# Altium PCB WemosESP8266_PCB.PcbDoc
Units mil, origin at the board's own origin, x right, y up, seen from the top; angles counter-clockwise.
Board outline 1985 x 1610 mil, 4 copper layers (Top Layer, GND, 3.3VDC, Bottom Layer), stack 53.912 mil thick; 17 components, 18 nets, 65 pads, 0 vias.
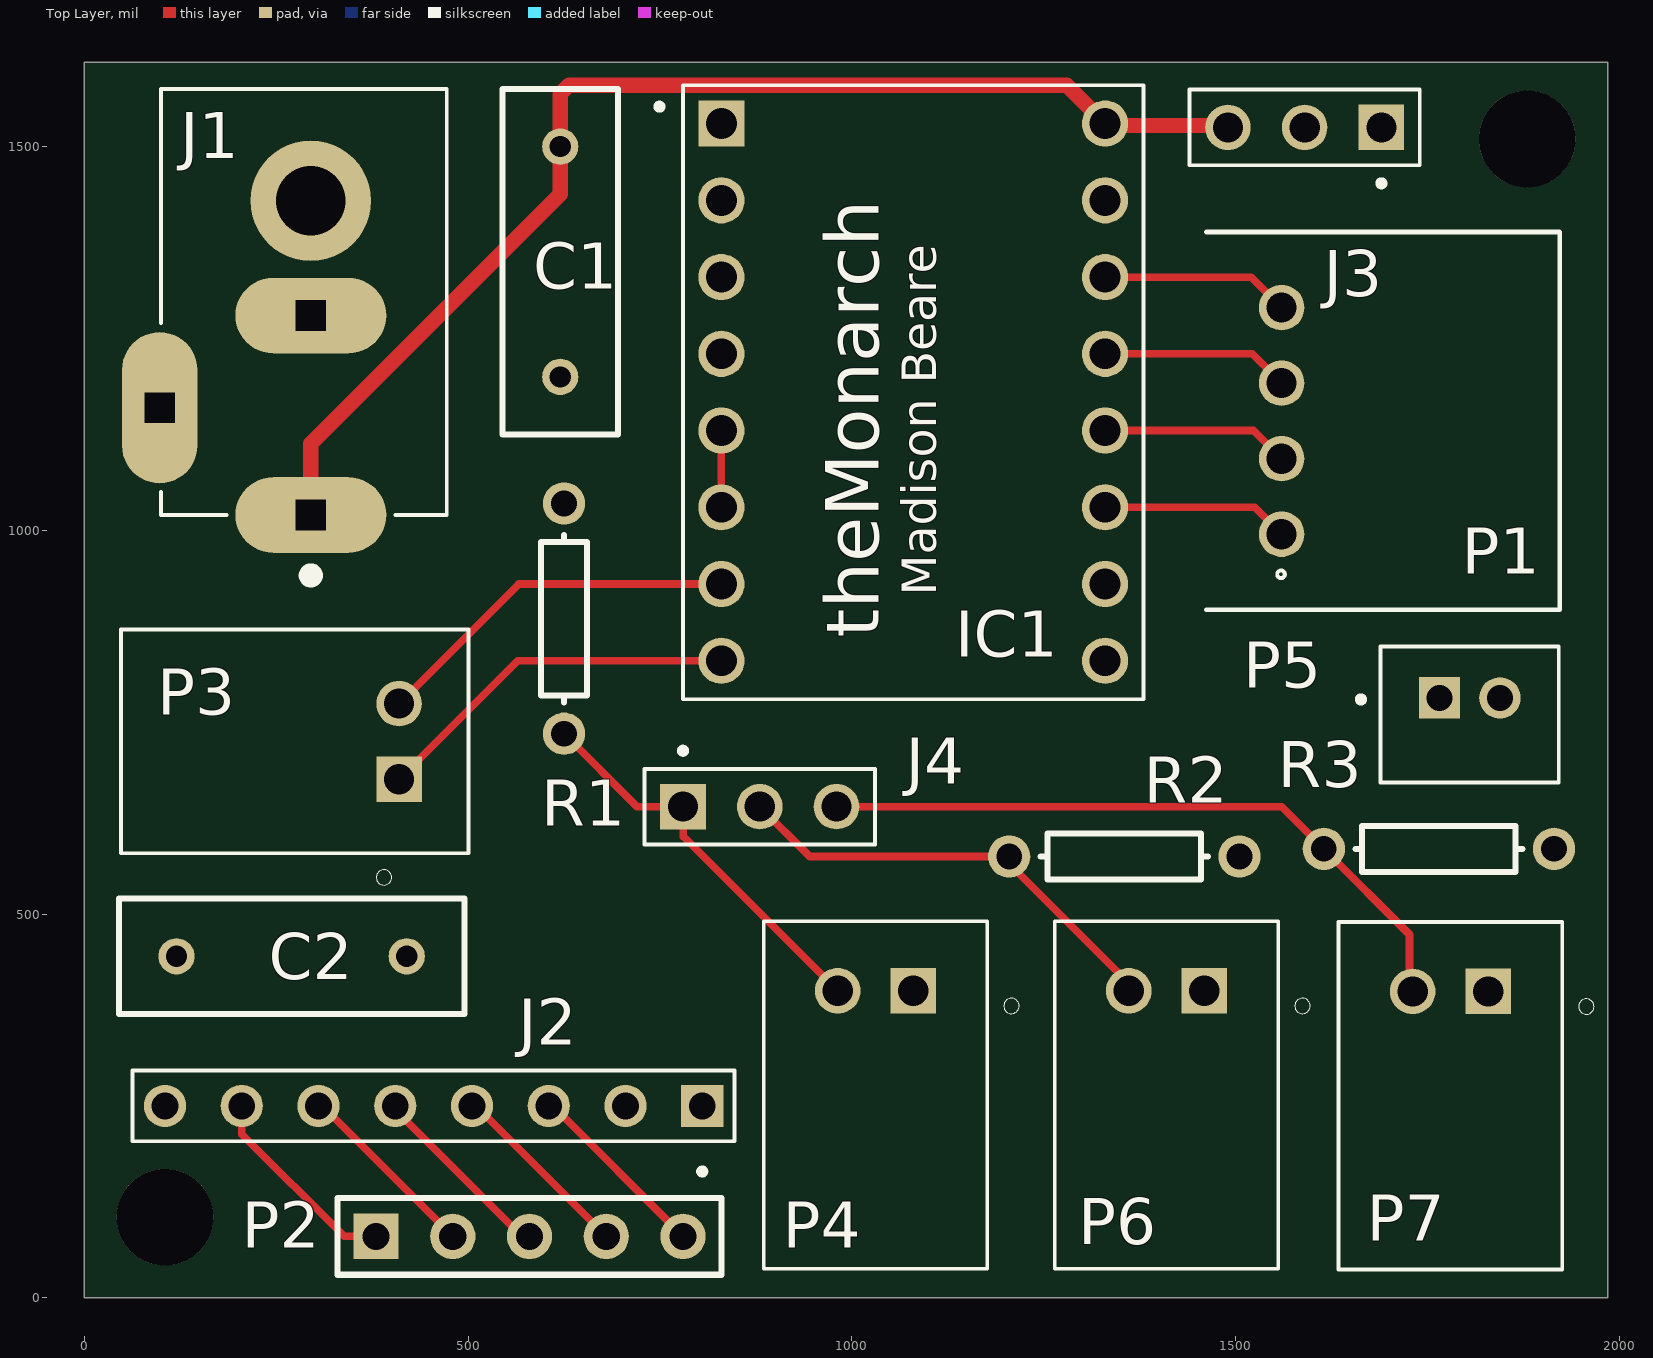
[diagram p0: Top Layer view]
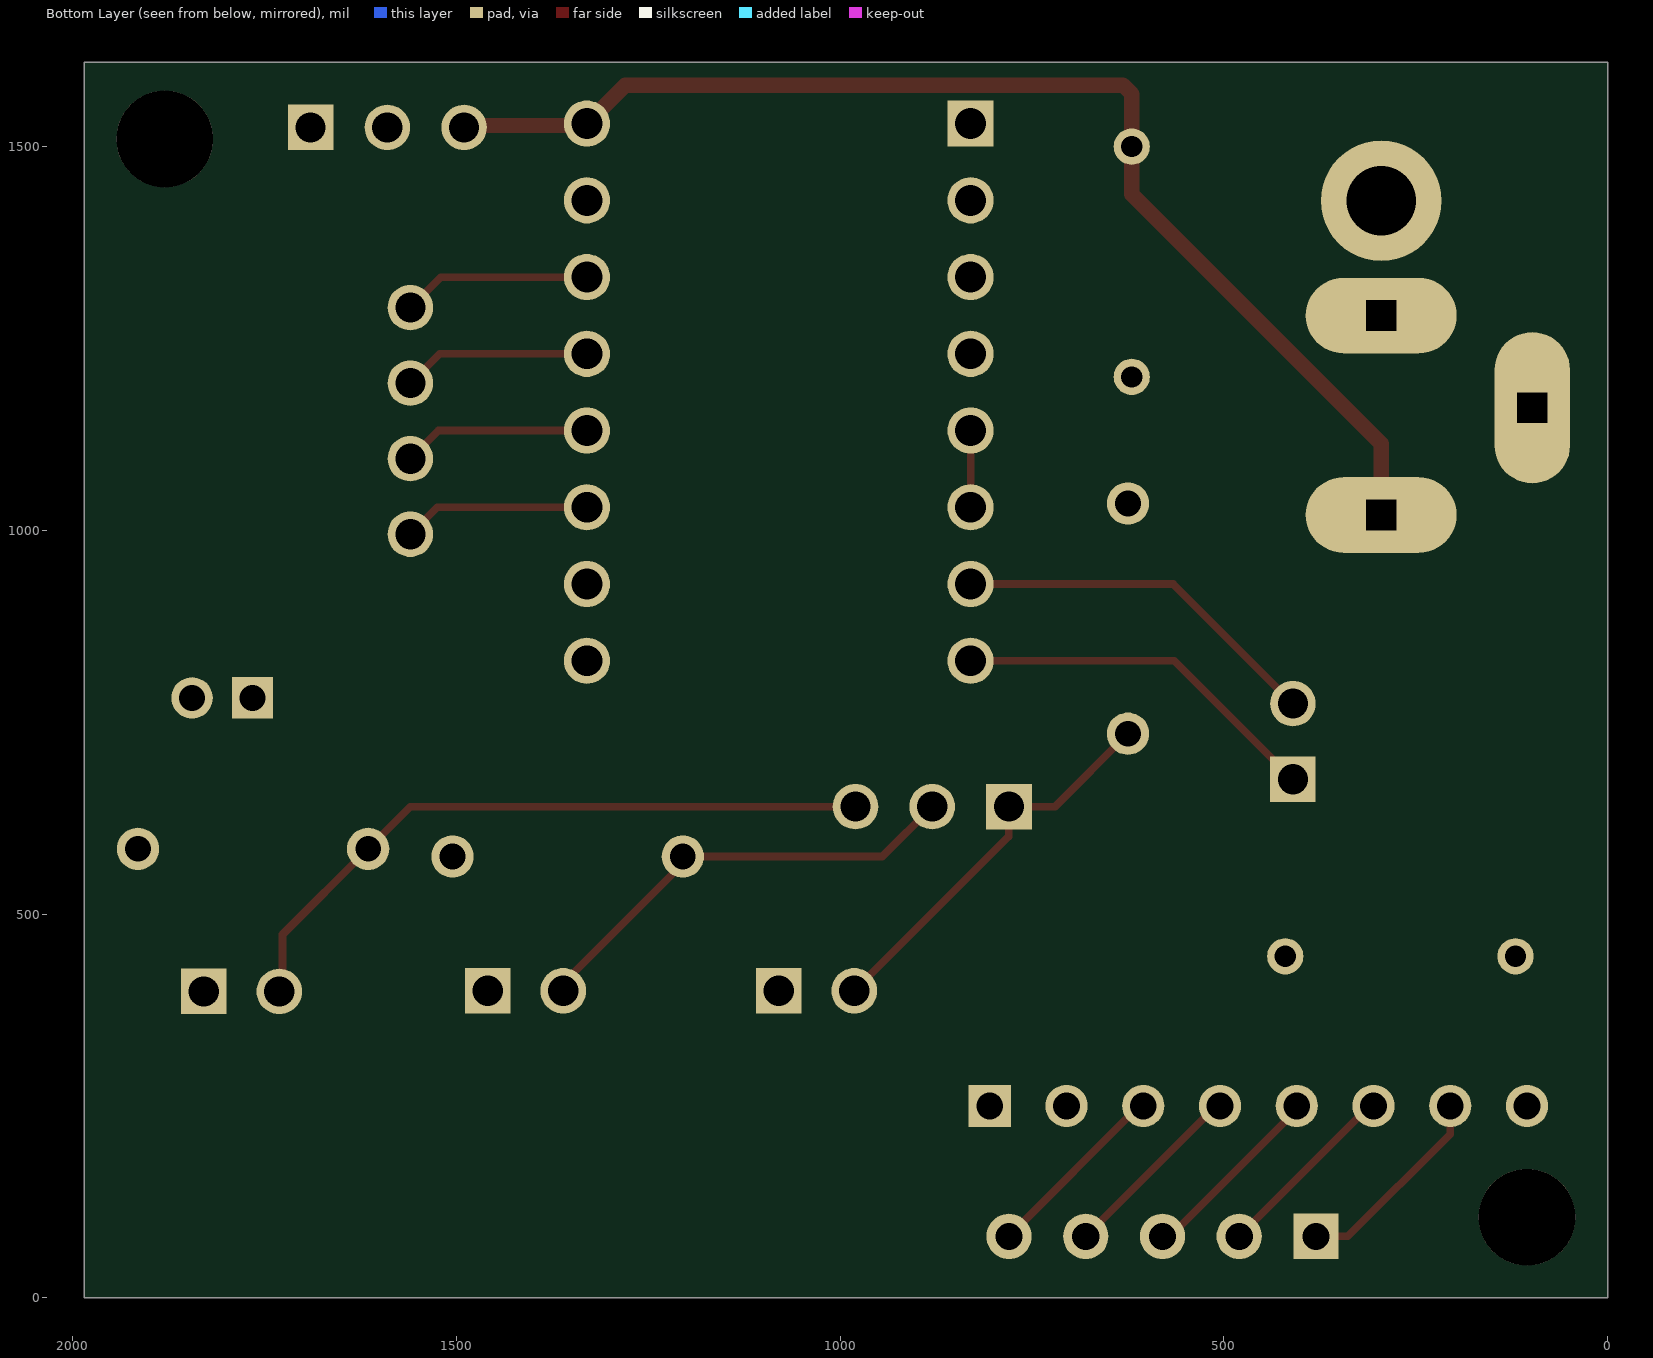
[diagram p1: Bottom Layer view, seen from below]
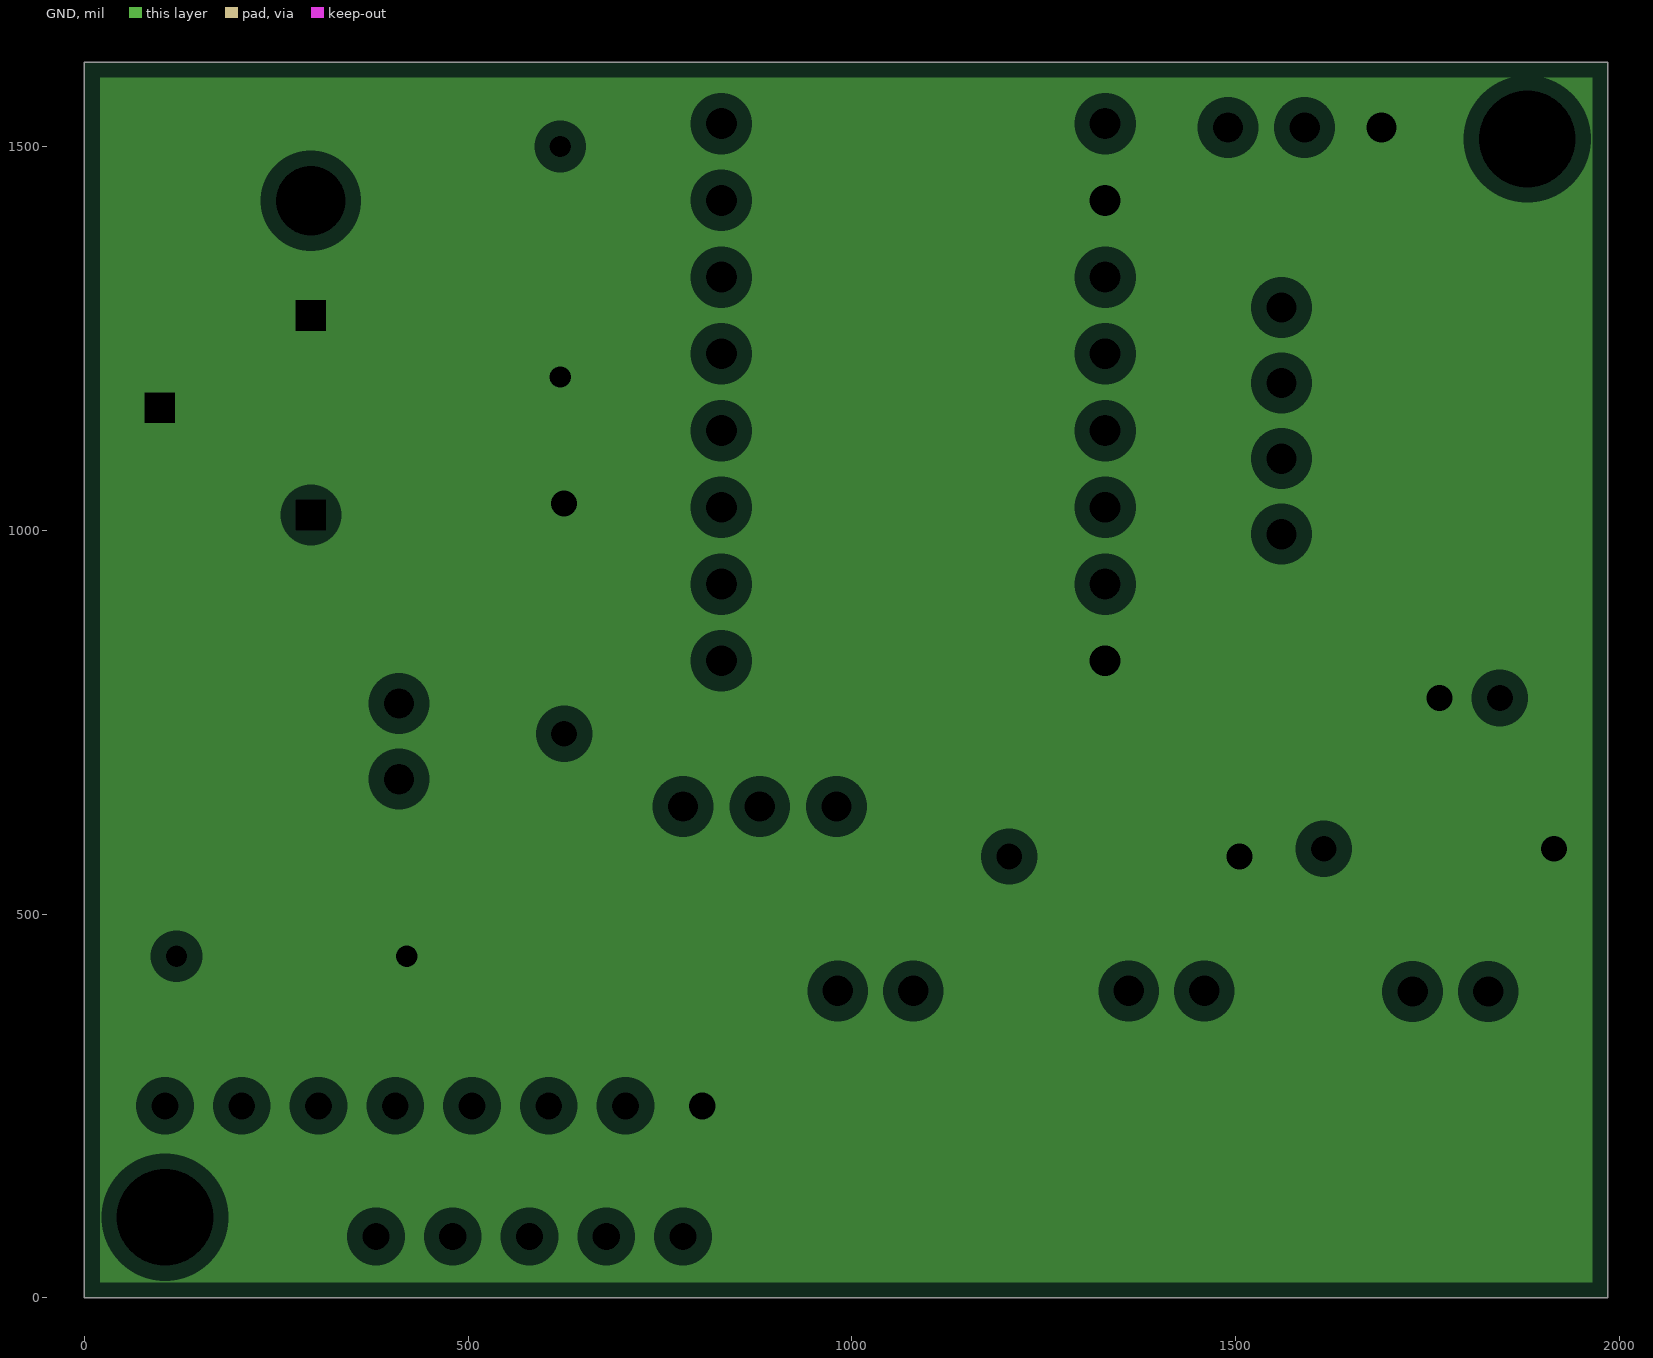
[diagram p2: GND, clearances drawn from the general rule]
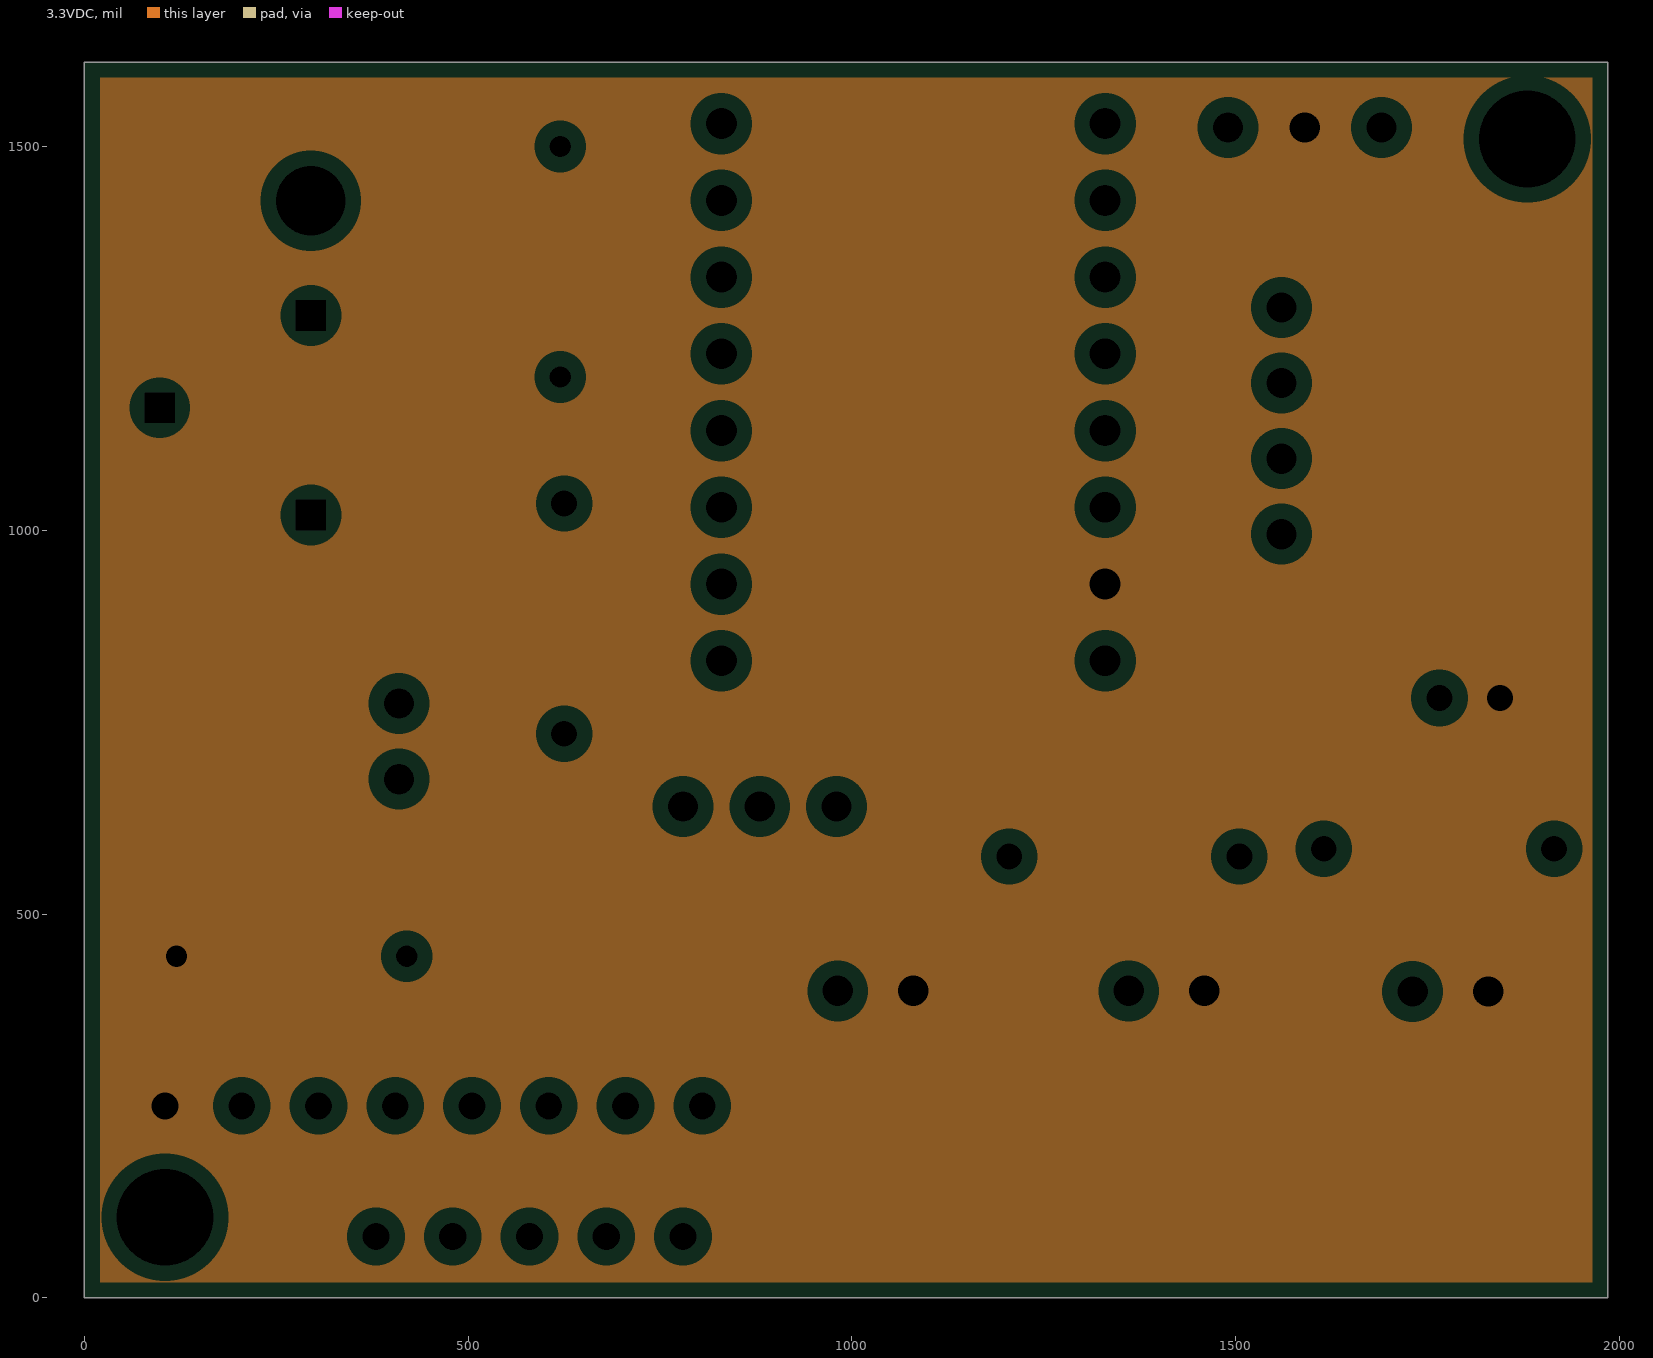
[diagram p3: 3.3VDC, clearances drawn from the general rule]

## Layer stack, top to bottom
Top Solder: solder mask 1, SM-001, Dk 4
Top Layer: signal copper 1.378
Dielectric 1: prepreg 5.1, PP-017, Dk 4.3
Dielectric 2: prepreg 5.1, PP-017, Dk 4.3
GND: plane copper 1.378, net GND
Dielectric 3: core 28, Core-039, Dk 4.8
3.3VDC: plane copper 1.378, net 3.3VDC
Dielectric 4: prepreg 5.1, PP-017, Dk 4.3
Dielectric 5: prepreg 5.1, PP-017, Dk 4.3
Bottom Layer: signal copper 1.378
Bottom Solder: solder mask 1, SM-001, Dk 4

## Board outline
0,0 0,1610 1985,1610 1985,0

## Design rules (kind name [scope] priority, off if disabled: settings)
Clearance [All] p1: gap=10 ignorepadtopadclearanceinfootprint=FALSE except(0: Arc-Hole Track-Hole SMDPad-Hole THPad-Hole Via-Hole Fill-Hole Poly-Hole Region-Hole Text-Hole)
HoleSize [All] p1: absolutevalues=TRUE maxlimit=130 minlimit=1 maxpercent=80.000 minpercent=20.000
PlaneClearance [All] p1: clearance=20
PlaneConnect [All] p1: planeconnectstyle=Relief reliefexpansion=20 reliefentries=4 reliefconductorwidth=10 reliefairgap=10
PolygonConnect [All] p1: connectstyle=Relief reliefconductorwidth=10 reliefentries=4 polygonreliefangle="90 Angle" airgapwidth=10
RoomDefinition WemosESP8266 [InComponentClass('WemosESP8266')] p1: confinementstyle=ConfineIn formatcopy=TRUE lockcomponents=FALSE outline 1980,1610 0,1610 0,5 1980,5
RoutingVias [All] p1: holewidth=28 width=50 viastyle="Through Hole" minholewidth=28 minwidth=50 maxholewidth=28 maxwidth=50
SilkToSolderMaskClearance [IsPad] p1: minsilkscreentomaskgap=7.5 clearancetoexposedcopper=TRUE
SolderMaskExpansion [All] p1: expansion=4 istentingtop=FALSE
Width [All] p1: maxlimit=20 minlimit=10 preferedwidth=10
26 further rules are at their usual default settings.

## Components (designator, comment, footprint, x,y, rotation, side; value= is the part's Value field where it differs from the comment)
C1 "100uF" RAD-0.3 620,1350 r270 top value=100pF
C2 "Cap" RAD-0.3 270,445 r180 top value=10uF
IC1 "a4988" MODULE_A4988_STEPPER_MOTOR_DRIVER_CARRIER 1080,1180 r0 top
J1 "FC681478" FC681478 295,1020 r90 top
J2 "nRF24L01+" TE_5-146278-8 455,250 r180 top
J3 "826936-3" TE_826936-3 1590,1525 r180 top
J4 "826936-3" TE_826936-3 880,640 r0 top
P1 "S4B-XH-A" S4B-XH-A(LF)(SN) 1559.21,1142.64 r180 top
P2 "Header 5" HDR1X5 380,80 r0 top
P3 "2x1 Header" JST_S2B-XH-A(LF)(SN) 410,725 r90 top
P4 "2x1 Header" JST_S2B-XH-A(LF)(SN) 1030.79,400 r180 top
P5 "B2B-PH-K-S" JST_B2B-PH-K-S(LF)(SN) 1805,760 r180 top
P6 "2x1 Header" JST_S2B-XH-A(LF)(SN) 1410,400 r180 top
P7 "2x1 Header" JST_S2B-XH-A(LF)(SN) 1779.96,399.17 r180 top
R1 "Res1" AXIAL-0.3 625,885 r90 top value=10K
R2 "Res1" AXIAL-0.3 1355,575 r0 top value=1K
R3 "Res1" AXIAL-0.3 1765,585 r0 top value=1K

## Footprints (in the part's own frame and the unit in brackets; to place one, negate y for a bottom-side part, rotate by r counter-clockwise, add the part's x,y. Pads: shape width x height; smd on the part's side, far side on the other; paste and mask are expansions set on the pad)
AXIAL-0.3 [mm] "Axial Device, Thru-Hole; 2 Leads; 0.3 in Pin Spacing"
  round 1.4 hole 0.85: 1(-3.81,0) 2(3.81,0)
  silkscreen extent -2.77,-0.76 2.77,0.76
FC681478 [mm]
  oval 2.5x5 hole 1 square: 1(0,0) 2(6.6,0)
  round 4 hole 2.3: 1(10.4,0)
  oval 5x2.5 hole 1 square: 3(3.55,5)
  silkscreen extent -2.2,-4.5 14.1,4.95
HDR1X5 [mm] "Connector; Header; 5 Position"
  rect 1.5x1.5 hole 0.9: 1(0,0)
  round 1.5 hole 0.9: 2(2.54,0) 3(5.08,0) 4(7.62,0) 5(10.16,0)
  silkscreen extent -1.27,-1.27 11.43,1.27
JST_B2B-PH-K-S(LF)(SN) [mm]
  rect 1.368x1.368 hole 0.86: 1(1,-0.55)
  round 1.368 hole 0.86: 2(-1,-0.55)
  silkscreen extent -2.95,-2.25 3.7,2.25
JST_S2B-XH-A(LF)(SN) [mm]
  rect 1.508x1.508 hole 1: 1(-1.25,0)
  round 1.508 hole 1: 2(1.25,0)
  silkscreen extent -4.75,-2.3 3.7,9.2
MODULE_A4988_STEPPER_MOTOR_DRIVER_CARRIER [mm]
  rect 1.53x1.53 hole 1.02: 1(-6.35,8.89)
  round 1.53 hole 1.02: 2(-6.35,6.35) 3(-6.35,3.81) 4(-6.35,1.27) 5(-6.35,-1.27) 6(-6.35,-3.81) 7(-6.35,-6.35) 8(-6.35,-8.89) 9(6.35,-8.89) 10(6.35,-6.35) 11(6.35,-3.81) 12(6.35,-1.27) 13(6.35,1.27) 14(6.35,3.81) 15(6.35,6.35) 16(6.35,8.89)
  silkscreen extent -8.5,-10.16 7.62,10.16
RAD-0.3 [mm] "Radial Cap, Thru-Hole; 2 Leads; 0.3 in Pin Spacing"
  round 1.2 hole 0.7: 1(-3.81,0) 2(3.81,0)
  silkscreen extent -5.71,-1.91 5.71,1.91
S4B-XH-A(LF)(SN) [mm]
  round 1.508 hole 1: 1(-0.02,3.75) 2(-0.02,1.25) 3(-0.02,-1.25) 4(-0.02,-3.75)
  silkscreen extent -9.22,-6.25 2.48,6.25
TE_5-146278-8 [mm]
  rect 1.398x1.398 hole 0.89: 1(-8.89,0)
  round 1.398 hole 0.89: 2(-6.35,0) 3(-3.81,0) 4(-1.27,0) 5(1.27,0) 6(3.81,0) 7(6.35,0) 8(8.89,0)
  silkscreen extent -9.96,-1.17 9.96,2.27
TE_826936-3 [mm]
  rect 1.508x1.508 hole 1: 1(-2.54,0)
  round 1.508 hole 1: 2(0,0) 3(2.54,0)
  silkscreen extent -3.81,-1.25 3.81,1.95

## Part data
C1: library part Cap, "Capacitor", LatestRevisionDate=17-Jul-2002, LatestRevisionNote="Re-released for DXP Platform.", PackageDescription="Radial Cap, Thru-Hole; 2 Leads; 0.3 in Pin Spacing", PackageReference=RAD-0.3, Published=8-Jun-2000, Publisher="Altium Limited"
C2: "Capacitor", LatestRevisionDate=17-Jul-2002, LatestRevisionNote="Re-released for DXP Platform.", PackageDescription="Radial Cap, Thru-Hole; 2 Leads; 0.3 in Pin Spacing", PackageReference=RAD-0.3, Published=8-Jun-2000, Publisher="Altium Limited"
J1: "CLIFF ELECTRONIC COMPONENTS         FC681478            CONNECTOR, POWER ENTRY, RCPT, 2A, 16VDC", Color=Black, Current Rating=2A, Manufacturer=Cliff, Supplier Part Number 1=2450496, Voltage Rating=16V, Category=Connectors, ComponentLink1Description=https://datasheet.ciiva.com/46428/1859070-46428805.pdf?src-supplier=Element14, ComponentLink1URL=https://datasheet.ciiva.com/46428/1859070-46428805.pdf?src-supplier=Element14, Gender=Male, Length=15.2mm, Manufacturer Part Number=FC681478, Mount="Through Hole", Orientation="Right Angle", Pricing 1="1=1.94000, 50=0.87800, 100=0.78800, 250=0.70300, 500=0.66600, 1000=0.65500 (GBP)", REACH SVHC="No SVHC", RoHS=Yes, Stock 1=534, Supplier 1=Farnell, Termination="Through Hole", Voltage Rating (DC)=16V, Width=9mm
J2: library part WRL-00691, "SPARKFUN TRANSCEIVER BREAKOUT -", Frequency=2.4GHz, Manufacturer=SparkFun, Supplier Part Number 1=1568-1295-ND, Category="RF Semiconductors and Devices", ComponentLink1Description=https://github.com/sparkfun/Transceiver_Breakout-nRF24L01/tree/V_1.3?src-supplier=Digi-Key, ComponentLink1URL=https://github.com/sparkfun/Transceiver_Breakout-nRF24L01/tree/V_1.3?src-supplier=Digi-Key, Manufacturer Part Number=WRL-00691, Pricing 1="1=20.95000 (USD)", RoHS=No, Stock 1=59, Supplier 1=Digi-Key
J3 J4: "Connector Header Through Hole 3 position 0.100 (2.54mm)", Package=None, Availability=Unavailable, EU_RoHS_Compliance=Compliant, MF="TE Connectivity", MP=826936-3, Price=None, SnapEDA_Link=https://www.snapeda.com/parts/826936-3/TE%20Connectivity%20AMP%20Connectors/view-part/2390122/?ref=snap
P1: library part S4B-XH-A(LF)(SN), "Conn Shrouded Header HDR 4 POS 2.5mm Solder RA Thru-Hole Box", Color=Natural, Contact Resistance=20mR, Current Rating=3A, Housing Color=White, Insulation Resistance=1GR, Manufacturer=JST, Max Operating Temperature=85°C, Max Voltage Rating (AC)=250V, Min Operating Temperature=-25°C, Package Quantity=500, Supplier Part Number 1=455-2243-ND, Category="Headers and Wire Housings", ComponentLink1Description=https://datasheet.ciiva.com/726/exh-726400.pdf?src-supplier=Digi-Key, ComponentLink1URL=https://datasheet.ciiva.com/726/exh-726400.pdf?src-supplier=Digi-Key, ComponentLink2Description=https://datasheet.ciiva.com/26924/getdatasheetpartid-449045-26924078.pdf?src-supplier=Verical, ComponentLink2URL=https://datasheet.ciiva.com/26924/getdatasheetpartid-449045-26924078.pdf?src-supplier=Verical, ComponentLink3Description=https://datasheet.ciiva.com/8052/5448-8052236.pdf?src-supplier=Element14, ComponentLink3URL=https://datasheet.ciiva.com/8052/5448-8052236.pdf?src-supplier=Element14, Connector Type="Male Pin", Contact Material=Brass, Contact Plating=Tin,Lead,Copper, Depth=11.5mm, Gender=Male, Housing Material=Polyamide, Lead Free="Lead Free", Lead Pitch=2.5mm, Length=12.4mm, Manufacturer Part Number=S4B-XH-A(LF)(SN), Max Current Rating=3A, Mount="Through Hole", Number of Contacts=4, Number of Positions=4, Number of Rows=1, Orientation="Right Angle", Packaging=Bulk, Pitch=2.5mm, Pricing 1="1=0.27000, 10=0.25700, 100=0.17850, 500=0.15100, 1000=0.12355, 5000=0.10982, 10000=0.09953 (USD)", REACH SVHC="No SVHC", RoHS=Yes, Stock 1=8950, Supplier 1=Digi-Key, Termination=Press-Fit, Voltage Rating=250V, Voltage Rating (AC)=250V, Wire/Cable Gauge=22AWG
P2: "Header, 5-Pin", LatestRevisionDate=17-Jul-2002, LatestRevisionNote="Re-released for DXP Platform.", Publisher="Altium Limited"
P3 P4 P6 P7: library part S2B-XH-A(LF)(SN), "Conn Shrouded Header HDR 2 POS 2.5mm Solder RA Thru-Hole Box", Color=Natural, Contact Resistance=20mR, Current Rating=3A, Housing Color=White, Insulation Resistance=1GR, Manufacturer=JST, Max Operating Temperature=85°C, Max Voltage Rating (AC)=250V, Min Operating Temperature=-25°C, Package Quantity=1000, Supplier Part Number 1=455-2257-ND, Category="Headers and Wire Housings", ComponentLink1Description=https://datasheet.ciiva.com/16208/s2b-xh-alfsn-16208978.pdf?src-supplier=Future+Electronics, ComponentLink1URL=https://datasheet.ciiva.com/16208/s2b-xh-alfsn-16208978.pdf?src-supplier=Future+Electronics, ComponentLink2Description=https://datasheet.ciiva.com/8052/1684882-8052211.pdf?src-supplier=Element14, ComponentLink2URL=https://datasheet.ciiva.com/8052/1684882-8052211.pdf?src-supplier=Element14, ComponentLink3Description=https://datasheet.ciiva.com/11746/0900766b8082f560-11746947.pdf?src-supplier=RSComponents, ComponentLink3URL=https://datasheet.ciiva.com/11746/0900766b8082f560-11746947.pdf?src-supplier=RSComponents, ComponentLink4Description=https://datasheet.ciiva.com/26924/getdatasheetpartid-645395-26924076.pdf?src-supplier=Verical, ComponentLink4URL=https://datasheet.ciiva.com/26924/getdatasheetpartid-645395-26924076.pdf?src-supplier=Verical, ComponentLink5Description=https://datasheet.ciiva.com/26894/getdatasheetpartid-640270-26894603.pdf?src-supplier=Verical, ComponentLink5URL=https://datasheet.ciiva.com/26894/getdatasheetpartid-640270-26894603.pdf?src-supplier=Verical, ComponentLink6Description=https://datasheet.ciiva.com/26894/getdatasheetpartid-441330-26894909.pdf?src-supplier=Verical, ComponentLink6URL=https://datasheet.ciiva.com/26894/getdatasheetpartid-441330-26894909.pdf?src-supplier=Verical, ComponentLink7Description=https://datasheet.ciiva.com/20207/523653-20207183.pdf?src-supplier=Rapid+Electronics, ComponentLink7URL=https://datasheet.ciiva.com/20207/523653-20207183.pdf?src-supplier=Rapid+Electronics, ComponentLink8Description=https://datasheet.ciiva.com/726/exh-726412.pdf?src-supplier=Digi-Key, ComponentLink8URL=https://datasheet.ciiva.com/726/exh-726412.pdf?src-supplier=Digi-Key, Connector Type="Male Pin", Contact Material=Brass, Contact Plating=Tin,Copper,Lead, Depth=11.5mm, Gender=Male, Housing Material=Polyamide, Lead Free="Lead Free", Lead Pitch=2.5mm, Length=7.4mm, Manufacturer Part Number=S2B-XH-A(LF)(SN), Max Current Rating=3A, Max Voltage Rating (DC)=250V, Mount="Through Hole", Number of Contacts=2, Number of Positions=2, Number of Rows=1, Orientation="Right Angle", Packaging=Bulk, Pitch=2.5mm, Pricing 1="1=0.18000, 10=0.16800, 100=0.11710, 500=0.09904, 1000=0.08104, 5000=0.07204, 10000=0.06528 (USD)", REACH SVHC="No SVHC", RoHS=Yes, Stock 1=54562, Supplier 1=Digi-Key, Termination=Press-Fit, Voltage Rating=250V, Voltage Rating (AC)=250V, Wire/Cable Gauge=22AWG
P5: library part B2B-PH-K-S(LF)(SN), "Connector Header, PH Series, 2 Position, 2.00mm, Through Hole, Press-Fit, Solder, Natural", Manufacturer=JST, Supplier Part Number 1=455-1704-ND, Category=Connectors, ComponentLink1Description=http://www.farnell.com/datasheets/2057211.pdf?src-supplier=Farnell, ComponentLink1URL=http://www.farnell.com/datasheets/2057211.pdf?src-supplier=Farnell, ComponentLink2Description=http://www.farnell.com/datasheets/2057211.pdf?src-supplier=Newark, ComponentLink2URL=http://www.farnell.com/datasheets/2057211.pdf?src-supplier=Newark, ComponentLink3Description=http://www.farnell.com/datasheets/2057211.pdf?src-supplier=Element14, ComponentLink3URL=http://www.farnell.com/datasheets/2057211.pdf?src-supplier=Element14, Height=0.35inch, Length=0.2inch, Manufacturer Part Number=B2B-PH-K-S(LF)(SN), Pricing 1="1=0.17000, 10=0.16200, 100=0.10020, 500=0.08288, 1000=0.07252, 5000=0.06216, 10000=0.06044 (USD)", RoHS=Yes, Stock 1=37001, Supplier 1=Digi-Key, Weight=0.0625lb, Width=0.24inch
R1 R2 R3: "Resistor", LatestRevisionDate=17-Jul-2002, LatestRevisionNote="Re-released for DXP Platform.", PackageDescription="Axial Device, Thru-Hole; 2 Leads; 0.3 in Pin Spacing", PackageReference=AXIAL-0.3, Published=8-Jun-2000, Publisher="Altium Limited"
IC1: ComponentLink1Description="New link"

## Free pads (board coordinates)
  round 125.98 hole 125.98 unplated: 4(1880,1510) 5(105,105)

## Nets (pads, with @x,y where several pads share a name; then routed paths per layer and width w, separated by ;. In a path a pad name is that pad's centre, name@x,y a point inside that pad or via, vN(x,y) a via of type N, cw(c..) or ccw(c..) an arc to the next point about the centre after c; other vN are vias at no path point)
3.3VDC: C2.2 IC1.10 J2.8 J3.2 P4.1 P5.2 P6.1 P7.1
12VDC: C1.1 IC1.16 J1.1@295,1020 J3.3 | length 1580.7
  Top Layer w10: IC1.16 IC1.16@1332.5,1527.5 ; J3.3@1487.5,1527.5 J3.3
  Top Layer w20: J1.1@295,1020 295,1112.88 620,1437.88 C1.1 620,1568.4 631.72,1580.12 1279.88,1580.12 IC1.16 ; IC1.16@1332.5,1527.5 J3.3@1487.5,1527.5
GND: C1.2 C2.1 IC1.9 IC1.15 J1.2 J1.3 J2.1 J3.1 P5.1 R1.2 R2.2 R3.2
NetIC1_5: IC1.5 IC1.6 | length 100
  Top Layer w10: IC1.6 IC1.5
NetIC1_7: IC1.7 P3.2 | length 484.5
  Top Layer w10: P3.2 565.79,930 IC1.7
NetIC1_8: IC1.8 P3.1 | length 484.1
  Top Layer w10: P3.1 564.45,830.24 829.76,830.24 IC1.8
NetIC1_11: IC1.11 P1.1 | length 244.5
  Top Layer w10: IC1.11 1525,1030 P1.1
NetIC1_12: IC1.12 P1.2 | length 245.1
  Top Layer w10: IC1.12 1523.43,1130 P1.2
NetIC1_13: IC1.13 P1.3 | length 245.8
  Top Layer w10: IC1.13 1521.85,1230 P1.3
NetIC1_14: IC1.14 P1.4 | length 246.5
  Top Layer w10: IC1.14 1520.28,1330 P1.4
NetJ2_3: J2.3 P2.5 | length 245.4
  Top Layer w10: J2.3 610,250 P2.5
NetJ2_4: J2.4 P2.4 | length 245.4
  Top Layer w10: J2.4 510,250 P2.4
NetJ2_5: J2.5 P2.3 | length 248.3
  Top Layer w10: J2.5 405,245 570,80 P2.3
NetJ2_6: J2.6 P2.2 | length 245.4
  Top Layer w10: J2.6 310,250 P2.2
NetJ2_7: J2.7 P2.1 | length 266.8
  Top Layer w10: J2.7 205.17,249.83 205.17,213.34 338.51,80 P2.1
NetJ4_1: J4.1 P4.2 R1.1 | length 517.8
  Top Layer w10: R1.1 720,640 J4.1 780.4,639.6 780.4,601.17 P4.2
NetJ4_2: J4.2 P6.2 R2.1 | length 591.5
  Top Layer w10: J4.2 945,575 R2.1 1205,565.39 1360.79,409.61 P6.2
NetJ4_3: J4.3 P7.2 R3.1 | length 894
  Top Layer w10: J4.3 1560,640 R3.1 1726.57,473.43 P7.2@1726.57,395
pads on no net: IC1.1 IC1.2 IC1.3 IC1.4 J1.1@295,1429.45 J2.2

## Polygon pours and split planes (outlines as drawn)
GND on GND (split plane): 1964.9,20.1 20.1,20.1 20.1,1589.9 1964.9,1589.9
3.3VDC on 3.3VDC (split plane): 1964.9,20.1 20.1,20.1 20.1,1589.9 1964.9,1589.9

## Silkscreen, mask and mechanical layers (free items; w line width, h text height)
Top Overlay:
  text "Madison Beare" at 1110,915 h45 r90
  text "theMonarch" at 1035,860 h70 r90